# Altium PCB SATA-Modular-Backplane.PcbDoc
Units mm, origin at the board's own origin, x right, y up, seen from the top; angles counter-clockwise.
Board outline 35.6 x 81.6 mm, 4 copper layers (Top Layer, Inner Layer 1, Inner Layer 2, Bottom Layer), stack 1.593 mm thick; 18 components, 15 nets, 102 pads, 10 vias.
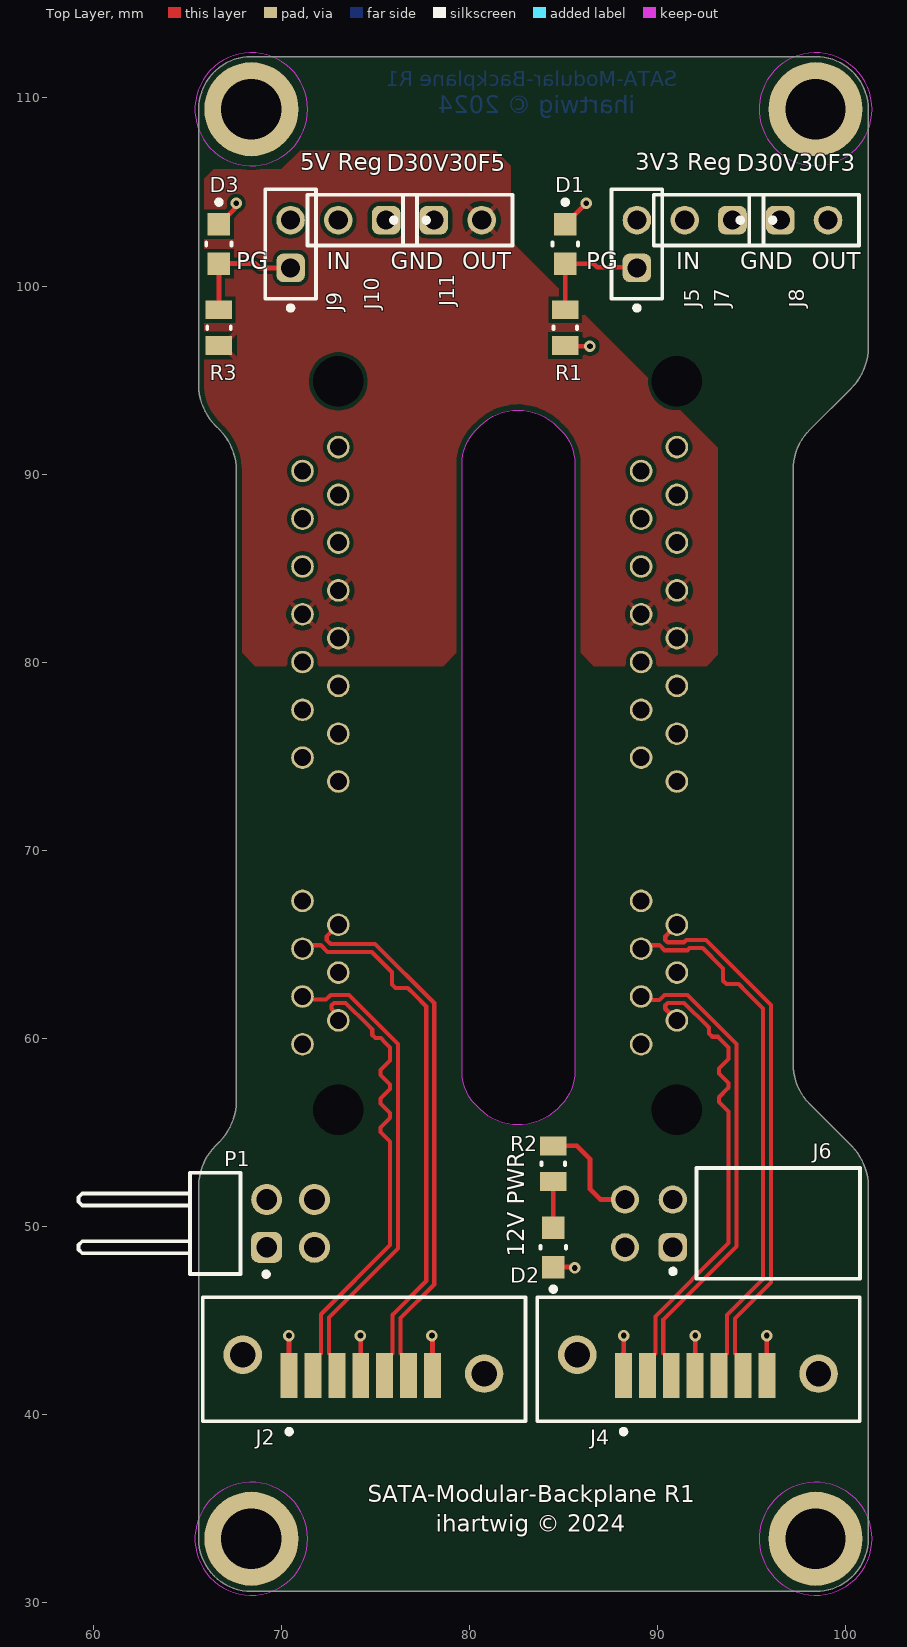
[diagram p0: Top Layer view]
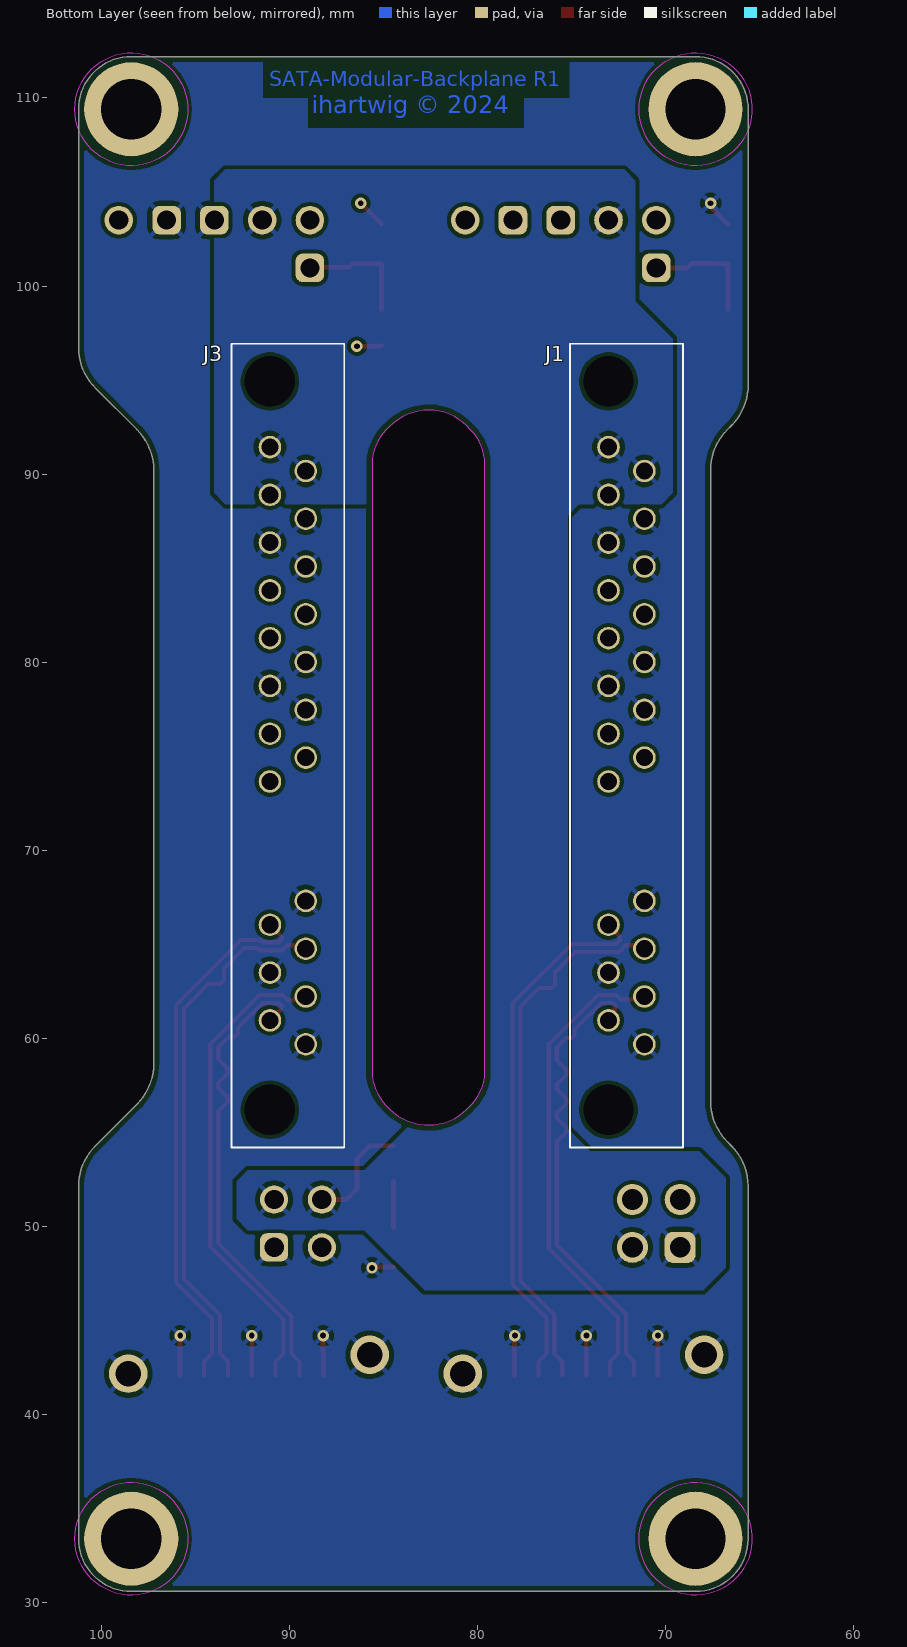
[diagram p1: Bottom Layer view, seen from below]
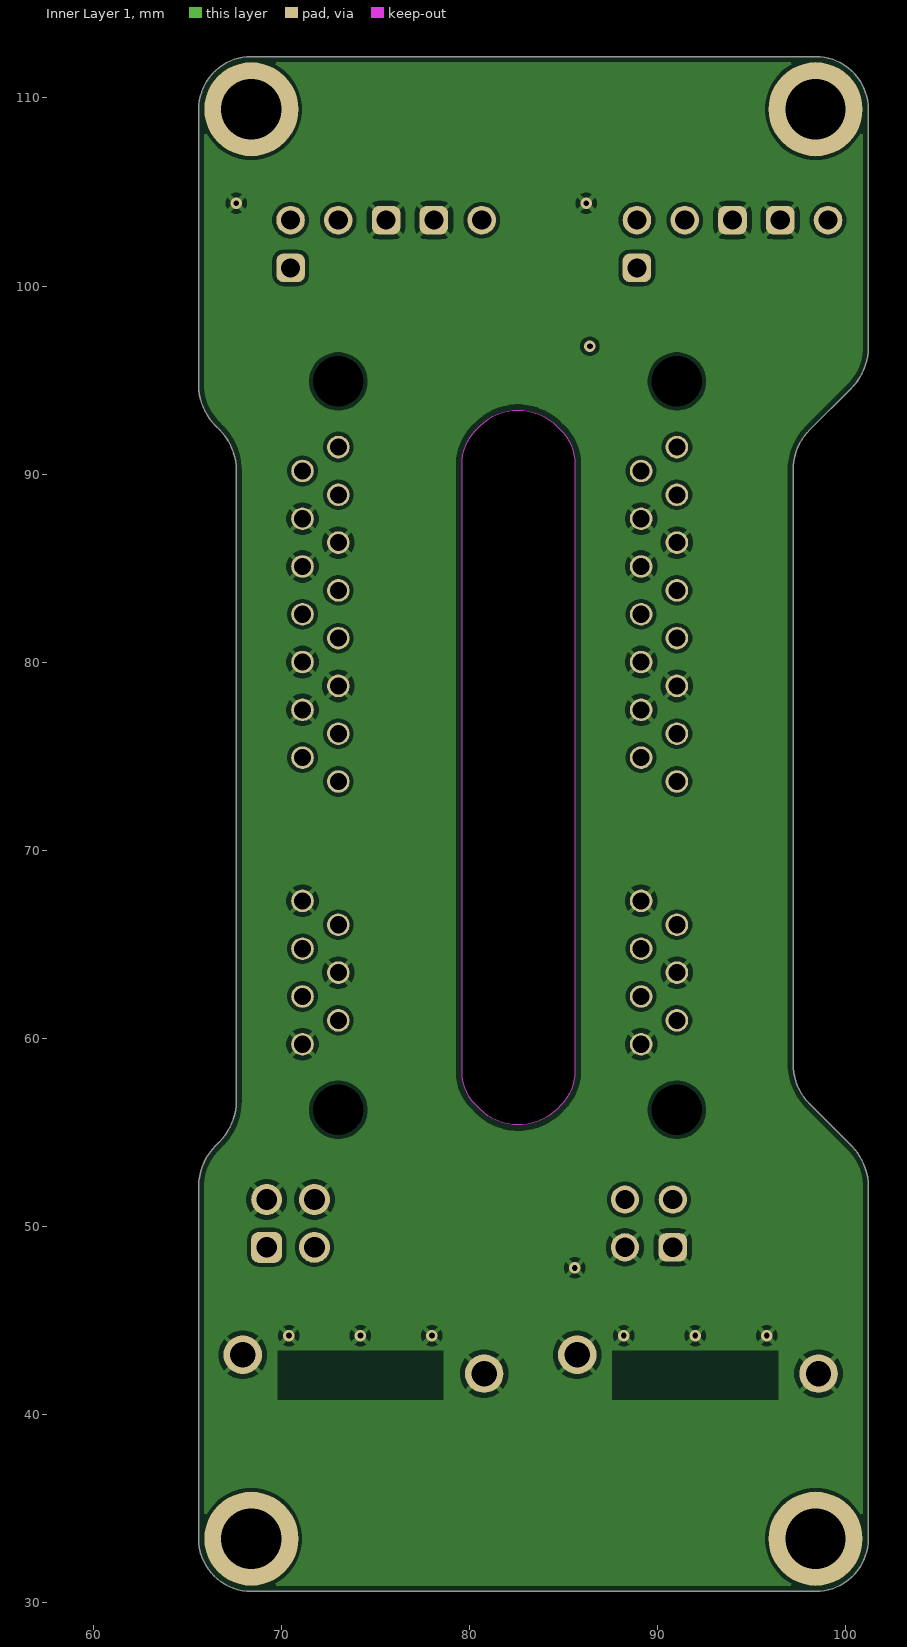
[diagram p2: Inner Layer 1]
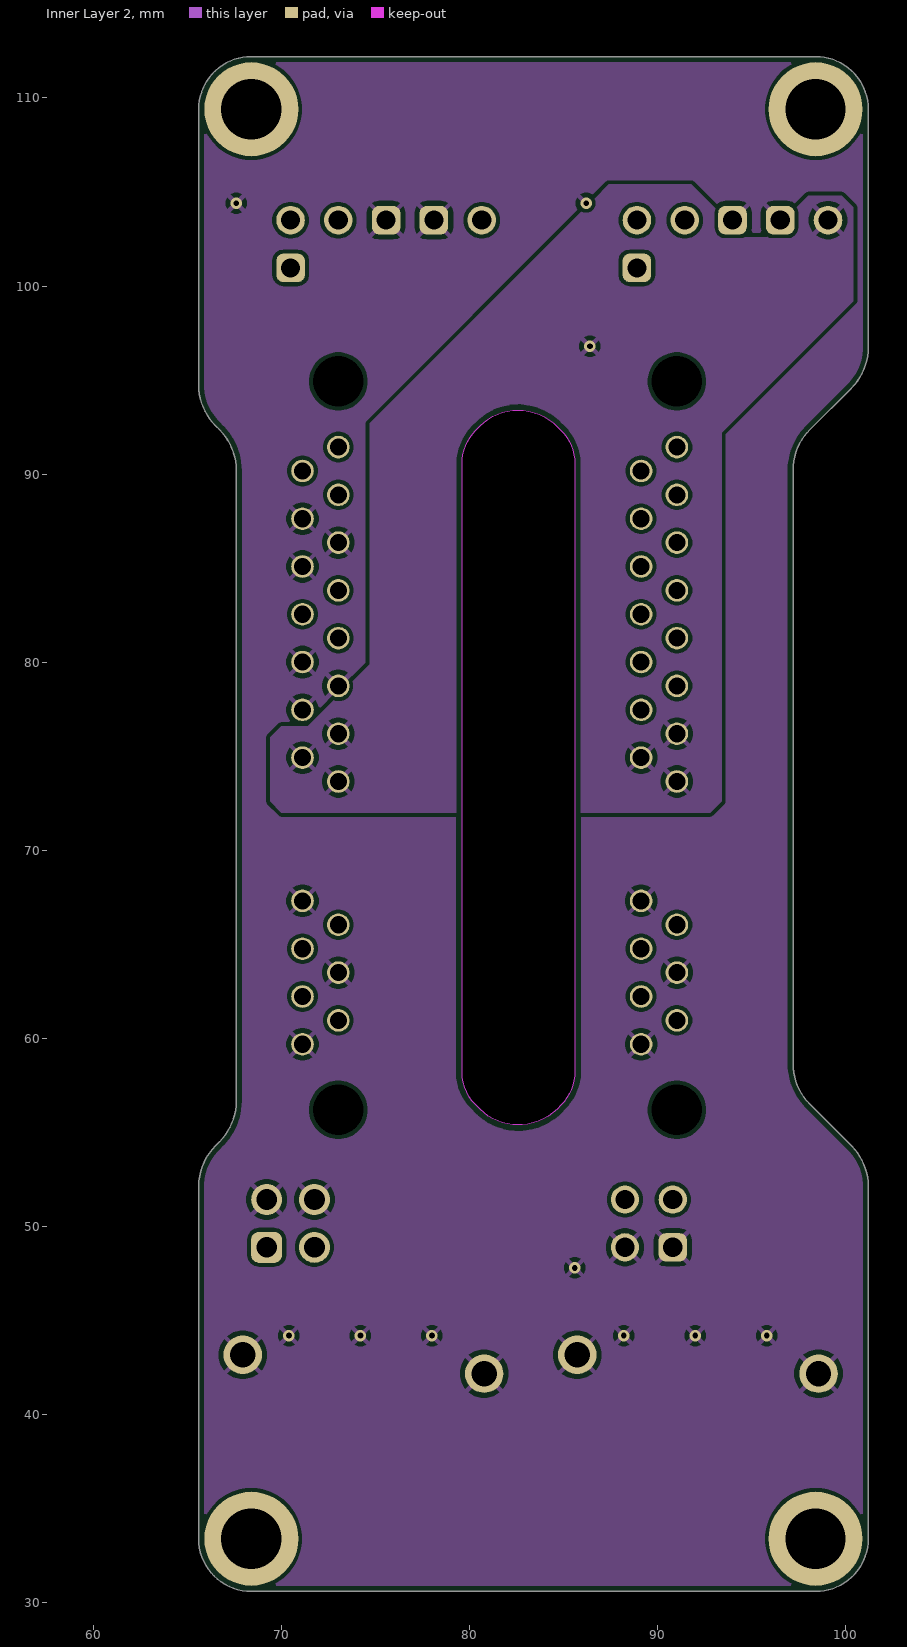
[diagram p3: Inner Layer 2]
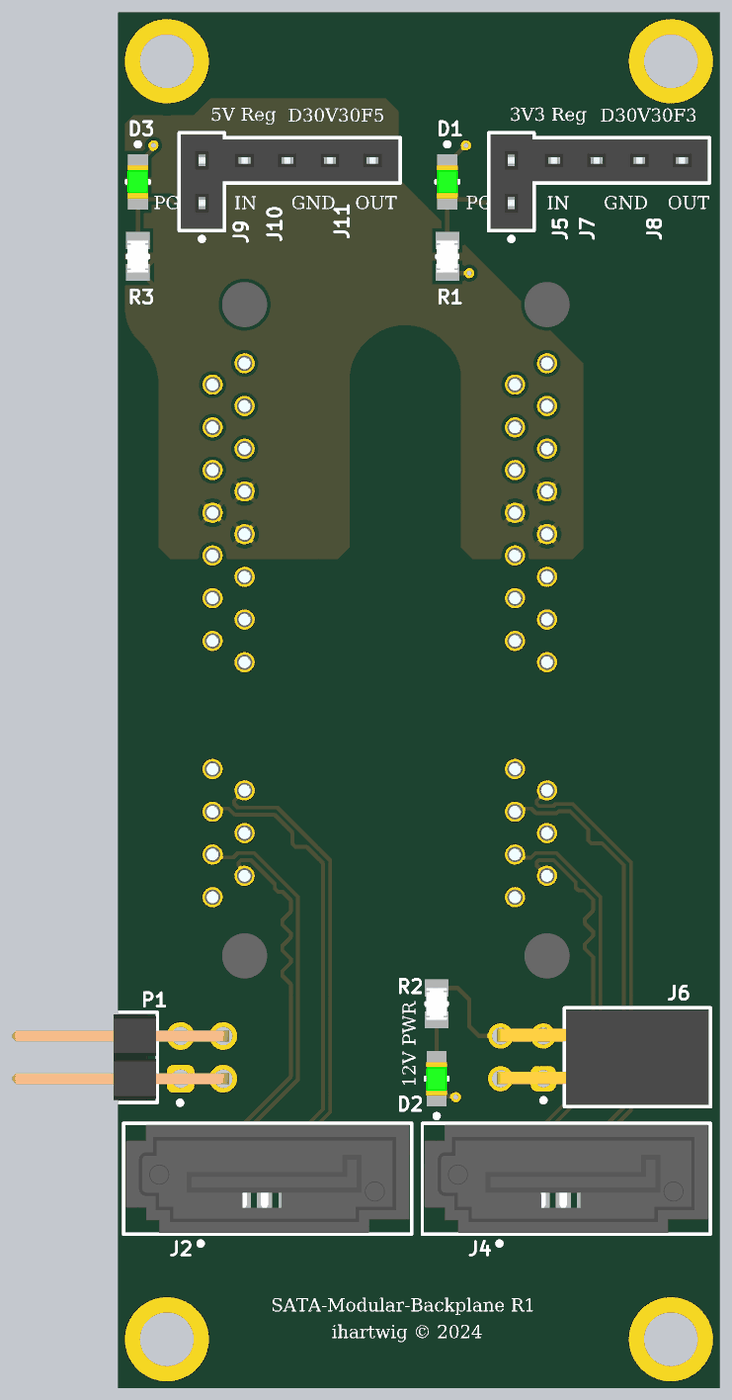
[diagram p4: 3D render of the assembled board from above, using the file's embedded part models]

## Layer stack, top to bottom
Top Solder: solder mask 0.0102, Solder Resist, Dk 3.5
Top Layer: signal copper 0.0356
Dielectric 2: prepreg 0.2104, PP-022, Dk 4.5
Inner Layer 1: signal copper 0.018
Dielectric 1: core 1.065, Core-042, Dk 4.6
Inner Layer 2: signal copper 0.018
Dielectric 3: prepreg 0.2104, PP-022, Dk 4.5
Bottom Layer: signal copper 0.0356
Bottom Solder: solder mask 0.0102, Solder Resist, Dk 3.5

## Board outline
65.6,33.4 65.6,52.13 cw(c68.666,52.13) 66.498,54.298 66.702,54.502 ccw(c64.534,56.67) 67.6,56.67 67.6,90.2 ccw(c64.534,90.2) 66.702,92.368 66.498,92.572 cw(c68.666,94.74) 65.6,94.74 65.6,109.4 cw(c68.4,109.4) 68.4,112.2 98.4,112.2 cw(c98.4,109.4) 101.2,109.4 101.2,96.74 cw(c98.134,96.74) 100.302,94.572 98.098,92.368 ccw(c100.266,90.2) 97.2,90.2 97.2,58.67 ccw(c100.266,58.67) 98.098,56.502 100.302,54.298 cw(c98.134,52.13) 101.2,52.13 101.2,33.4 cw(c98.4,33.4) 98.4,30.6 68.4,30.6 cw(c68.4,33.4)
cut-out: 79.6,58.2 79.6,90.548 cw(c82.14,90.548) 80.344,92.344 80.576,92.576 cw(c82.566,90.586) 82.566,93.4 cw(c82.566,90.42) 84.673,92.527 84.856,92.344 cw(c83.06,90.548) 85.6,90.548 85.6,58.252 cw(c83.06,58.252) 84.856,56.456 cw(c82.556,58.404) 82.804,55.4 82.566,55.4 cw(c82.566,58.214) 80.576,56.224 80.307,56.493 cw(c82.014,58.2)

## Design rules (kind name [scope] priority, off if disabled: settings)
BoardOutlineClearance [All] p1: gap=0.3 ignorepadtopadclearanceinfootprint=FALSE
Clearance [All] p1: gap=0.203 ignorepadtopadclearanceinfootprint=FALSE except(0: Arc-Hole Track-Hole SMDPad-Hole THPad-Hole Via-Hole Fill-Hole Poly-Hole Region-Hole Text-Hole)
DiffPairsRouting [All] p1: maxlimit=0.203 minlimit=0.102 mostfreqgap=0.203 toplayer_minwidth=0.113 toplayer_maxwidth=0.22 toplayer_prefwidth=0.22 midlayer1_minwidth=0.113 midlayer1_maxwidth=0.22 midlayer1_prefwidth=0.22 midlayer2_minwidth=0.113 midlayer2_maxwidth=0.22 midlayer2_prefwidth=0.22 bottomlayer_minwidth=0.113 bottomlayer_maxwidth=0.22 bottomlayer_prefwidth=0.22 maxuncoupledlength=12.7
HoleSize [All] p1: absolutevalues=TRUE maxlimit=6.35 minlimit=0.2 maxpercent=80.000 minpercent=20.000
MatchedLengths [All] p1: tolerance=0.1 checknetsindiffpair=TRUE checkdiffpairvsdiffpair=FALSE checkxsignals=FALSE checkothers=FALSE
MinimumAnnularRing [All] p1: minimumring=0.13
MinimumSolderMaskSliver [All] p1: minsoldermaskwidth=0.1
PolygonConnect [All] p1: connectstyle=Relief reliefconductorwidth=0.254 reliefentries=4 polygonreliefangle="45 Angle" airgapwidth=0.254
RoutingVias [All] p1: holewidth=0.305 width=0.61 viastyle="Through Hole" minholewidth=0.305 minwidth=0.61 maxholewidth=0.711 maxwidth=1.27
SilkToSilkClearance [All] p1: silktosilkclearance=0
SilkToSolderMaskClearance [IsPad] p1: minsilkscreentomaskgap=0 clearancetoexposedcopper=TRUE
SolderMaskExpansion [All] p1: expansion=0.038 istentingtop=FALSE
UnRoutedNet [All] p1: checkbadconnections=TRUE
Width [All] p1: maxlimit=5 minlimit=0.203 preferedwidth=0.254
24 further rules are at their usual default settings.

## Classes and differential pairs
differential pair B2: +B2_P -B2_N
differential pair B1: +B1_P -B1_N
differential pair A2: +A2_P -A2_N
differential pair A1: +A1_P -A1_N

## Components (designator, comment, footprint, x,y, rotation, side; value= is the part's Value field where it differs from the comment)
D1 "Green" FP-LTST-C170GKT-MFG 85.09,102.235 r270 top
D2 "Green" FP-LTST-C170GKT-MFG 84.455,48.895 r90 top
D3 "Green" FP-LTST-C170GKT-MFG 66.675,102.235 r270 top
J1 "0877011001" 0877011001 71.12,59.69 r90 bottom
J2 "67800-5025" FP-67800-5025-MFG 74.395,42.945 r180 top
J3 "0877011001" 0877011001 89.12,59.69 r90 bottom
J4 "67800-5025" FP-67800-5025-MFG 92.175,42.945 r180 top
J5 "61300211821" 61300211821 88.9,102.235 r90 top
J6 "613004243121" 613004243121 96.415,50.165 r90 top
J7 "61300211821" 61300211821 92.71,103.505 r180 top
J8 "61300211821" 61300211821 97.79,103.505 r0 top
J9 "61300211821" 61300211821 70.485,102.235 r90 top
J10 "61300211821" 61300211821 74.295,103.505 r180 top
J11 "61300211821" 61300211821 79.375,103.505 r0 top
P1 "61300421021" 61300421021 66.485,50.165 r270 top
R1 "2.2k" FP-CRCW0805-e3-IPC_B 85.09,97.79 r270 top
R2 "2.2k" FP-CRCW0805-e3-IPC_B 84.455,53.34 r90 top
R3 "2.2k" FP-CRCW0805-e3-IPC_B 66.675,97.79 r270 top

## Footprints (in the part's own frame and the unit in brackets; to place one, negate y for a bottom-side part, rotate by r counter-clockwise, add the part's x,y. Pads: shape width x height; smd on the part's side, far side on the other; paste and mask are expansions set on the pad)
0877011001 [mm]
  round 1.34 hole 2.68 unplated: MH1(-3.49,1.906) MH2(35.24,1.906)
  round 1.2 hole 0.91: P1(13.97,1.905) P2(15.24,0) P3(16.51,1.905) P4(17.78,0) P5(19.05,1.905) P6(20.32,0) P7(21.59,1.905) P8(22.86,0) P9(24.13,1.905) P10(25.4,0) P11(26.67,1.905) P12(27.941,0) P13(29.21,1.905) P14(30.48,0) P15(31.75,1.905) S1(0,0) S2(1.27,1.905) S3(2.54,0) S4(3.81,1.905) S5(5.08,0) S6(6.351,1.905) S7(7.62,0)
  silkscreen extent -5.49,-2.05 37.24,3.95, body extent -5.49,-2.05 37.24,3.95, height 8.35
61300211821 [mm] "Socket Header, Pitch 2.54 mm, THT, Vertical, single row, 2p"
  rrect50% 1.52x1.52 hole 1.02: 1(-1.27,0)
  round 1.52 hole 1.02: 2(1.27,0)
  silkscreen extent -3.52,-1.35 2.92,1.35, body extent -2.79,-1.25 2.79,1.25, height 8.55
61300421021 [mm] "Pin Header, pitch 2.54 mm, THT, Angled, dual row, 4p"
  rrect50% 1.65x1.65 hole 1.1: 1(1.27,2.73)
  round 1.65 hole 1.1: 2(1.27,5.27) 3(-1.27,2.73) 4(-1.27,5.27)
  silkscreen extent -2.69,-7.27 2.82,2.83, body extent -2.54,-7.27 2.54,5.63, height 5.12
613004243121 [mm] "Socket Header, Pitch 2.54 mm, THT, Angled, dual row, 4p"
  rrect50% 1.5x1.5 hole 1.03: 1(-1.27,5.61)
  round 1.5 hole 1.03: 2(-1.27,8.15) 3(1.27,5.61) 4(1.27,8.15)
  silkscreen extent -2.94,-4.35 2.94,5.72, body extent -2.79,-4.25 2.79,8.35, height 5.05
FP-67800-5025-MFG [mm]
  rect 0.9x2.4 smd paste+0 mask+0: 1(3.99,0.865) 2(2.72,0.865) 3(1.45,0.865) 4(0.18,0.865) 5(-1.09,0.865) 6(-2.36,0.865) 7(-3.63,0.865)
  round 2.05 hole 1.35 paste-1000 mask+0: 8(-6.38,0.765) 9(6.45,-0.235)
  silkscreen extent -8.57,-3.3 8.57,3.97, body extent -8.67,-3.4 8.67,3.4, height 0.25
FP-CRCW0805-e3-IPC_B [mm]
  rect 1.007x1.408 smd paste+0 mask+0: 1(-0.951,0) 2(0.951,0)
  silkscreen extent -0.07,-0.63 0.07,0.63, body extent -1.7,-0.95 1.7,0.95, height 0.25
FP-LTST-C170GKT-MFG [mm]
  rect 1.2x1.2 smd paste+0 mask+0: 1(-1.05,0) 2(1.05,0)
  silkscreen extent -2.35,-0.67 0.08,0.67, body extent -1.75,-0.77 1.75,0.77, height 0.25

## Part data
D1 D2 D3: library part CMP-1674-00002-6, "LED GREEN CLEAR SMD", Case Code (Imperial)=0805, Case Code (Metric)=2012, Forward Current=30mA, Forward Voltage=2.1V, Lens Color=Colorless, Max Operating Temperature=85°C, Min Operating Temperature=-55°C, Package Quantity=1, Power Dissipation=100mW, Reverse Voltage=5V, Test Current=10mA, Case/Package=0805, Color=Green, Depth=1.25mm, Dominant Wavelength=569nm, Height=1.1mm, Illumination Color=Green, Lead Free="Lead Free", Length=2mm, Lens Style=Diffused, Lens Transparency=Clear, Luminous Intensity=6mcd, Mount="Surface Mount", Number of Elements=1, Number of LEDs=1, Number of Pins=2, Packaging="Tape and Reel", Power Rating=100mW, Radiation Hardening=No, Viewing Angle=130°, Voltage=5V, Wavelength=565nm, Width=1.25mm
J1 J3: "Connector", Manufacturer_Name=Molex, Mouser Part Number=N/A, Arrow Part Number=0877011001, Arrow Price/Stock=https://www.arrow.com/en/products/0877011001/molex, Datasheet Link=https://www.molex.com/pdm_docs/sd/877011001_sd.pdf, Height=8.25mm, Manufacturer_Part_Number=0877011001, Mouser Price/Stock=https://www.mouser.co.uk/ProductDetail/Molex/0877011001?qs=PBcRNPEHKsqwD0qCdO56GA%3D%3D
J2 J4: library part CMP-04776-000822-1, "CONN SATA HEADER 7POS SLD SMD", Color=Black, Current Rating=1.5A, Flammability Rating="UL94 V-0", Max Operating Temperature=85°C, Max Voltage Rating (AC)=15V, Min Operating Temperature=-35°C, Package Quantity=4800, Connector Type=SATA, Contact Material=Brass, Contact Plating=Gold, Gender=Male, Glow Wire Compliant=Non-compliant, Housing Material=Thermoplastic, Mount="Surface Mount", Number of Circuits=7, Number of Contacts=7, Number of Positions=7, Number of Rows=1, Orientation=Straight, Packaging=Tray, Pitch=1.27mm, Radiation Hardening=No, Series=67800, Termination=SMD/SMT, Voltage Rating=15V, Voltage Rating (DC)=15V
J5 J7 J8 J9 J10 J11: library part CMP-1502-01314-3, Contact Resistance=20mΩ, Current Rating=3A, Operating Supply Voltage=250V, Gender=Female, Lead Pitch=2.54mm, NexarPartId=61924708, Number of Pins=2, Orientation=Vertical, RoHS=Non-Compliant
J6: library part CMP-1502-01409-3, Contact Resistance=20mΩ, Current Rating=3A, Operating Supply Voltage=250V, Gender=Female, Lead Pitch=2.54mm, NexarPartId=61924715, Number of Pins=4, RoHS=Non-Compliant
P1: library part CMP-1502-01065-3, Color=Black, Contact Resistance=20mΩ, Current Rating=3A, Operating Supply Voltage=250V, Connector Type="Male Pin", Contact Material=Copper, Contact Mating Length=5.9944mm, Contact Plating=Gold, Gender=Male, Lead Pitch=2.54mm, Mount="Through Hole", NexarPartId=32855523, Number of Contacts=4, Number of Pins=4, Number of Positions=4, Number of Rows=2, Packaging=Bulk, Pitch=2.54mm, REACH SVHC=Unknown, RoHS=Compliant, Row Spacing=2.54mm, Termination=Solder
R1 R2 R3: library part CMP-2001-03760-2, "RES Thick Film, 2.2kΩ, 1%, 0.125W, 100ppm/°C, 0805", Case Code (Imperial)=0805, Case Code (Metric)=2012, Max Operating Temperature=155°C, Max Power Dissipation=125mW, Min Operating Temperature=-55°C, Package Quantity=10, Resistance=2.2kR, Temperature Coefficient=100ppm/°C, Tolerance=1%, Voltage Rating=150V, Case/Package=0805, Composition="Thick Film", Contact Plating=Tin, Depth=1.25mm, Features="Automotive AEC-Q200", Height=0.45mm, Lead Free="Lead Free", Length=2mm, Military Standard=Not, Number of Terminations=2, Packaging="Tape and Reel", Power Rating=125mW, Radiation Hardening=No, Termination=SMD/SMT, Voltage Rating (DC)=150V, Weight=0.000194oz, Width=1.25mm

## Free pads (board coordinates)
  round 5 hole 3.2 unplated: 1(68.4,33.4) 1(68.4,109.4) 1(98.4,33.4) 1(98.4,109.4)

## Via types
v1: diameter 0.61, hole 0.305, Top Layer to Bottom Layer, 10 vias

## Nets (pads, with @x,y where several pads share a name; then routed paths per layer and width w, separated by ;. In a path a pad name is that pad's centre, name@x,y a point inside that pad or via, vN(x,y) a via of type N, cw(c..) or ccw(c..) an arc to the next point about the centre after c; other vN are vias at no path point)
+3V3: J1.P1 J1.P2 J1.P3 J3.P1 J3.P2 J3.P3 J8.2 R1.2 | length 1.3
  Top Layer w0.254: R1.2 85.129,96.8 v1(86.4,96.8)
+5: J1.P7 J1.P8 J1.P9 J3.P7 J3.P8 J3.P9 J11.2 R3.2
+12: J1.P13 J1.P14 J1.P15 J3.P13 J3.P14 J3.P15 J6.3 J6.4 J7.2 J10.2 P1.1 P1.2 R2.2 | length 5.9
  Top Layer w0.254: R2.2 85.709,54.291 86.4,53.6 86.4,52 86.965,51.435 J6.4
A1_N: J1.S3 J2.3 | length 25.7
  Top Layer w0.22: J1.S3 71.289,62.061 72.37,62.061 72.623,62.314 73.586,62.314 76.2,59.699 76.2,48.837 72.522,45.159 72.522,43.253 72.945,42.83 J2.3
A1_P: J1.S2 J2.2 | length 25.7
  Top Layer w0.22: J2.2 71.675,42.83 72.098,43.253 72.098,45.334 75.777,49.013 75.777,54.4 75.777,54.51 75.269,55.018 75.269,55.272 75.777,55.78 75.777,56.034 75.269,56.542 75.269,56.796 75.777,57.304 75.777,57.558 75.269,58.066 75.269,58.32 75.777,58.828 75.777,59.269 75.777,59.524 75.511,59.789 75.287,60.013 75.008,60.013 74.828,60.193 74.828,60.472 74.75,60.55 74.593,60.707 73.41,61.89 72.799,61.89 72.67,61.761 72.67,61.579 73.025,61.224 J1.S2
A2_N: J3.S3 J4.3 | length 25.8
  Top Layer w0.22: J3.S3 89.307,62.043 90.089,62.043 90.36,62.314 91.586,62.314 94.2,59.699 94.2,48.947 90.302,45.049 90.302,43.253 90.725,42.83 J4.3
A2_P: J3.S2 J4.2 | length 25.7
  Top Layer w0.22: J4.2 89.455,42.83 89.878,43.253 89.878,45.224 93.777,49.123 93.777,56 93.777,56.11 93.269,56.618 93.269,56.872 93.777,57.38 93.777,57.634 93.269,58.142 93.269,58.396 93.777,58.904 93.777,59.153 93.777,59.524 93.35,59.95 93.211,60.09 92.908,60.09 92.728,60.269 92.728,60.572 92.65,60.65 91.41,61.89 90.536,61.89 90.406,61.761 90.406,61.579 J3.S2
B1_N: J1.S5 J2.5 | length 28.9
  Top Layer w0.22: J1.S5 71.307,64.957 72.09,64.957 72.447,64.6 74.8,64.6 75.8,63.6 75.878,63.522 75.878,62.866 76.057,62.686 76.714,62.686 77.1,62.3 77.701,61.699 77.701,47.099 75.908,45.307 75.908,43.253 75.485,42.83 J2.5
B1_P: J1.S6 J2.6 | length 28.9
  Top Layer w0.22: J1.S6 72.406,65.422 72.406,65.24 72.623,65.023 74.975,65.023 78.124,61.875 78.124,46.924 76.332,45.132 76.332,43.253 76.755,42.83 J2.6
B2_N: J3.S5 J4.5 | length 28.9
  Top Layer w0.22: J3.S5 89.307,64.957 90.09,64.957 90.36,64.687 91.586,64.687 91.698,64.8 92.4,64.8 93.4,63.8 93.478,63.722 93.478,63.066 93.657,62.886 94.314,62.886 94.7,62.5 95.6,61.6 95.6,47.199 93.688,45.287 93.688,43.253 93.265,42.83 J4.5
B2_P: J3.S6 J4.6 | length 28.9
  Top Layer w0.22: J3.S6 90.406,65.422 90.406,65.24 90.535,65.111 91.41,65.111 91.523,65.223 92.575,65.223 96.023,61.775 96.023,47.023 94.112,45.112 94.112,43.253 94.535,42.83 J4.6
GND: D1.1 D2.1 D3.1 J1.P4 J1.P5 J1.P6 J1.P10 J1.P11 J1.P12 J1.S1 J1.S4 J1.S7 J2.1 J2.4 J2.7 J2.8 J2.9 J3.P4 J3.P5 J3.P6 J3.P10 J3.P11 J3.P12 J3.S1 J3.S4 J3.S7 J4.1 J4.4 J4.7 J4.8 J4.9 J6.1 J6.2 J7.1 J8.1 J10.1 J11.1 P1.3 P1.4 | length 17
  Top Layer w0.254: D3.1 67.532,104.142 67.532,104.332 v1(67.6,104.4) ; v1(70.4,44.2) 70.405,44.195 J2.1 ; v1(74.2,44.2) 74.215,44.185 J2.4 ; v1(78,44.2) 78.025,44.175 J2.7 ; D2.1 85.555,47.845 v1(85.6,47.8) ; D1.1 86.2,104.395 v1(86.2,104.4) ; J4.1 88.185,43.28 88.2,43.295 v1(88.2,44.2) ; J4.4 91.995,44.195 v1(92,44.2) ; v1(95.8,44.2) 95.805,44.195 J4.7
PG_3V3: D1.2 J5.1 R1.1 | length 6.3
  Top Layer w0.254: R1.1 D1.2 86.615,101.185 86.8,101 88.865,101 J5.1
PG_5V: D3.2 J9.1 R3.1 | length 6.4
  Top Layer w0.254: R3.1 D3.2 67.275,101.185 67.29,101.2 68.6,101.2 68.835,100.965 J9.1
PG_12V: D2.2 R2.1 | length 2.4
  Top Layer w0.254: D2.2 R2.1
pads on no net: J1.MH1 J1.MH2 J3.MH1 J3.MH2 J5.2 J9.2

## Polygon pours and split planes (outlines as drawn)
GND on Bottom Layer "GND_L04_P003" (solid, pour order 3): 65.4,30.4 101.4,30.4 101.4,112.4 65.4,112.4
+12 on Bottom Layer "+12_L04_P000" (solid, pour order 0): 75.2,55.2 74,54 68.2,54 66.8,52.6 66.8,47.8 68,46.6 82.8,46.6 86,49.8 92.2,49.8 92.8,50.4 92.8,52.4 92.2,53 86,53 80.2,58.8 80.2,87.8 80.8,88.4 93.4,88.4 94,89 94,105.6 93.4,106.2 72.2,106.2 71.6,105.6 71.6,99.2 69.6,97.2 69.6,89 70.2,88.4 74.6,88.4 75.2,87.8
GND on Inner Layer 2 "GND_L03_P004" (solid, pour order 4): 65.4,30.4 101.4,30.4 101.4,112.4 65.4,112.4
+3V3 on Inner Layer 2 "+3V3_L03_P001" (solid, pour order 1): 91.8,105.4 94.6,102.6 95.8,102.6 98,104.8 99.8,104.8 100.4,104.2 100.4,99.2 93.4,92.2 93.4,72.6 92.8,72 70,72 69.4,72.6 69.4,76 70,76.6 71.4,76.6 74.7,79.9 74.7,92.7 87.4,105.4
+5 on Top Layer "+5_L01_P002" (solid, pour order 2): 71,107.2 70,106.2 66.4,106.2 65.6,105.4 65.6,82.8 68.6,79.8 78.6,79.8 79.8,81 85.4,81 86.6,79.8 92.6,79.8 93.2,80.4 93.2,91.4 82.2,102.4 82.2,106.4 81.4,107.2
GND on Inner Layer 1 "GND_L02_P006" (solid, pour order 6): 65.6,30.6 101.6,30.6 101.6,112.6 65.6,112.6

## Keep-outs
Top Layer:
  circle w0.05: c68.4,109.4 r3
  circle w0.05: c98.4,109.4 r3
  circle w0.05: c98.4,33.4 r3
  circle w0.05: c68.4,33.4 r3
Bottom Layer:
  circle w0.05: c68.4,109.4 r3
  circle w0.05: c98.4,109.4 r3
  circle w0.05: c98.4,33.4 r3
  circle w0.05: c68.4,33.4 r3

## Other copper
Inner Layer 1:
  pour cut-out: 87.6,43.4 87.6,40.8 96.4,40.8 96.4,43.4
  pour cut-out: 69.8,43.4 69.8,40.8 78.6,40.8 78.6,43.4
Bottom Layer:
  text "SATA-Modular-Backplane R1" at 91.05,110.617 h0.8
  text "ihartwig © 2024" at 88.803,108.877 h1.6

## Silkscreen, mask and mechanical layers (free items; w line width, h text height)
Top Overlay:
  text "5V Reg" at 71,105.867 h1.52
  text "3V3 Reg" at 88.8,105.867 h1.52
  text "D30V30F5" at 75.6,105.812 h1.52
  text "D30V30F3" at 94.2,105.812 h1.52
  text "PG" at 67.6,100.612 h1.52
  text "IN" at 72.4,100.6 h1.52
  text "GND" at 75.8,100.612 h1.52
  text "OUT" at 79.6,100.612 h1.52
  text "PG" at 86.2,100.612 h1.52
  text "IN" at 91,100.6 h1.52
  text "GND" at 94.4,100.612 h1.52
  text "OUT" at 98.2,100.612 h1.52
  text "12V PWR" at 83.2,48.4 h1.52 r90
  text "SATA-Modular-Backplane R1" at 74.6,35.061 h1.52
  text "ihartwig © 2024" at 78.2,33.467 h1.52
Dimensions:
  lines w0.254: 69.4,60 71.2,60 ; 69.4,67.4 71.2,67.4 ; 69.4,74 71.2,74 ; 69.4,91.8 71.2,91.8 ; 87.4,60 89.2,60 ; 87.4,67.4 89.2,67.4 ; 87.4,74 89.2,74 ; 87.4,91.8 89.2,91.8 ; 69.4,36.4 76.4,36.4 76.4,106.4 69.4,106.4 69.4,36.4 ; 70.4,68.2 70.4,69 72,69 72,59.2 71.2,59.2 71.2,68.2 70.4,68.2 ; 70.4,72.4 70.4,73.2 71.2,73.2 71.2,92.6 72,92.6 72,72.4 70.4,72.4 ; 87.4,36.4 87.4,106.4 94.4,106.4 94.4,36.4 87.4,36.4 ; 88.4,68.2 89.2,68.2 89.2,59.2 90,59.2 90,69 88.4,69 88.4,68.2 ; 88.4,72.4 90,72.4 90,92.6 89.2,92.6 89.2,73.2 88.4,73.2 88.4,72.4
Board Shape:
  lines w0.2: 65.6,33.4 ccw(c68.4,33.4) 68.4,30.6 98.4,30.6 ccw(c98.4,33.4) 101.2,33.4 101.2,52.13 ccw(c98.134,52.13) 100.302,54.298 98.098,56.502 cw(c100.266,58.67) 97.2,58.67 97.2,90.2 cw(c100.266,90.2) 98.098,92.368 100.302,94.572 ccw(c98.134,96.74) 101.2,96.74 101.2,109.4 ccw(c98.4,109.4) 98.4,112.2 68.4,112.2 ccw(c68.4,109.4) 65.6,109.4 65.6,94.74 ccw(c68.666,94.74) 66.498,92.572 66.702,92.368 cw(c64.534,90.2) 67.6,90.2 67.6,56.67 cw(c64.534,56.67) 66.702,54.502 66.498,54.298 ccw(c68.666,52.13) 65.6,52.13 65.6,33.4 ; 79.6,58.4 ccw(c82.6,58.4) 85.6,58.4 85.6,90.4 ccw(c82.6,90.4) 79.6,90.4 79.6,58.4
  text "CUTOUT" at 83.546,70.054 h1.52 r90

## Dimensions
102,30.6 to 102,112.2 on Dimensions
102,109.4 to 102,33.4 on Dimensions
65.6,30 to 101.2,30 on Dimensions
68.4,30 to 98.4,30 on Dimensions
87.4,35.427 to 94.4,35.427 on Dimensions
69.4,35.427 to 87.4,35.427 on Dimensions